# EAGLE board source_eagle (EAGLE 9.6.2)
REV: A
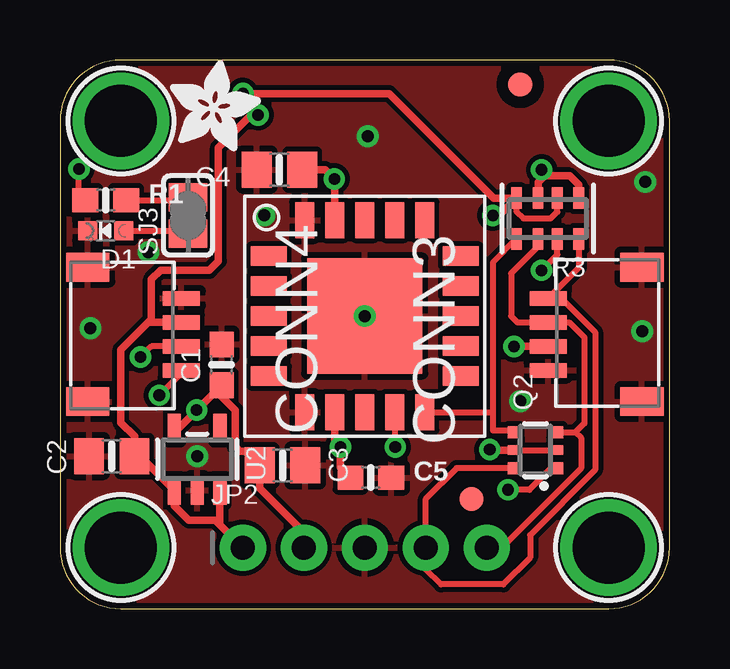
[diagram p0: board, top side]
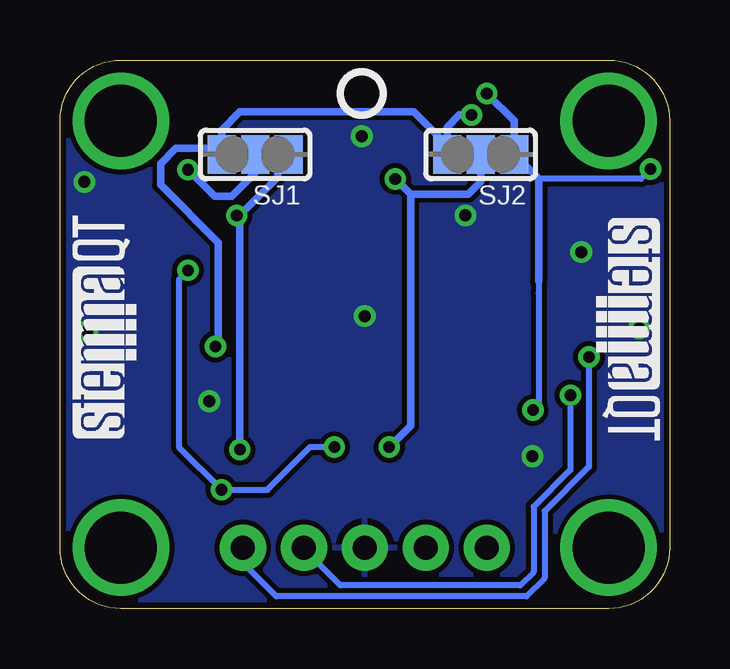
[diagram p1: board, bottom side, seen from below]

Size 25.4 x 22.86 mm. Coordinates in mm from the lower left corner, seen from the top.
Outline: 0,20.32 0,2.54 arc90 2.54,0 22.86,0 arc90 25.4,2.54 25.4,20.32 arc90 22.86,22.86 2.54,22.86 arc90 0,20.32
Copper layers (1*16): Top 0.035mm / dielectric 1.5mm / Bottom 0.035mm
Design rules "adafruit *": minimum track width 8mil, minimum drill 15.5mil, track to track 8mil, track to pad 8mil, pad to pad 8mil, via to via 8mil, smd to smd 8mil, copper to edge 10mil, drill to drill 8mil, minimum pad ring 10mil, minimum via ring 8mil, stop-mask expansion 2mil, vias tented up to drill 20mil, thermal gap 10mil
Net classes: 1 highpower: width 0.305 mm, drill 0.483 mm; 2 lowpower: width 0.254 mm, drill 0.483 mm

## Footprints (pad centres in the part's own frame; a part is rotated, then mirrored left to right if it is on the bottom)
0603-NO = smd 1.075 x 1: 1 -0.85,0; 2 0.85,0
0805-NO = smd 1.24 x 1.5: 1 -0.95,0; 2 0.95,0
JST_SH4 = smd 0.6 x 1.55: 1 -1.5,2.006; 2 -0.5,2.006; 3 0.5,2.006; 4 1.5,2.006 | smd 1.2 x 1.8: MT1 -2.8,-1.894; MT2 2.8,-1.894
CHIPLED_0603_NOOUTLINE = smd 0.8 x 0.8: A 0,-0.75; C 0,0.75
FIDUCIAL_1MM = smd 1 x 1: 1 0,0
1X05_ROUND_76 = drill 1 pad 1.93: 1 -5.08,0; 2 -2.54,0; 3 0,0; 4 2.54,0; 5 5.08,0
SOT363 = smd 0.5 x 0.5: 1 -0.75,-0.9; 3 0.75,-0.9; 4 0.75,0.9; 6 -0.75,0.9 | smd 0.4 x 0.5: 2 0,-0.9; 5 0,0.9
RESPACK_4X0603 = smd 0.45 x 0.9: 1 -1.3,-0.85; 2 -0.4,-0.85; 3 0.4,-0.85; 4 1.3,-0.85; 5 1.3,0.85; 6 0.4,0.85; 7 -0.4,0.85; 8 -1.3,0.85
SOLDERJUMPER_2WAY_OPEN_NOPASTE = smd 1.168 x 1.6: 1 -1.397,0; 2 0,0; 3 1.397,0
SOLDERJUMPER_CLOSEDWIRE = smd 1.168 x 1.6: 1 -0.762,0; 2 0.762,0 | smd 0.635 x 0.203: WIRE 0,0
SOT23-5 = smd 0.55 x 1.2: 1 -0.95,-1.3; 2 0,-1.3; 3 0.95,-1.3; 4 0.95,1.3; 5 -0.95,1.3
MOUNTINGHOLE_3.0_PLATEDTHIN = drill 3 pad 3.6: P$1 0,0
SCD41 = smd 1.5 x 0.8: 1 -4,2.5; 2 -4,1.25; 3 -4,0; 4 -4,-1.25; 5 -4,-2.5; 11 4,-2.5; 12 4,-1.25; 13 4,0; 14 4,1.25; 15 4,2.5 | smd 0.8 x 1.5: 6 -2.5,-4; 7 -1.25,-4; 8 0,-4; 9 1.25,-4; 10 2.5,-4; 16 2.5,4; 17 1.25,4; 18 0,4; 19 -1.25,4; 20 -2.5,4 | smd 4.8 x 4.8: P$1 0,0

## Placement (x,y rotation side)
C1  0.1uF  [0603-NO]  6.73,10.16 90 top
C2  10uF  [0805-NO]  2.16,6.35 180 top
C3  10uF  [0805-NO]  9.27,5.97 0 top
C4  10uF  [0805-NO]  9.14,18.29 180 top
C5  0.1uF  [0603-NO]  12.95,5.46 0 top
CONN3  STEMMA_I2C_QT  [JST_SH4]  22.35,11.43 90 top
CONN4  STEMMA_I2C_QT  [JST_SH4]  3.05,11.43 270 top
D1  GREEN  [CHIPLED_0603_NOOUTLINE]  1.91,15.75 90 top
FID3  FIDUCIAL_1MM  [FIDUCIAL_1MM]  19.18,21.84 0 top
FID4  FIDUCIAL_1MM  [FIDUCIAL_1MM]  17.14,4.57 0 top
JP2  [1X05_ROUND_76]  12.7,2.54 0 top
PLABEL0  [PLABEL0]  7.75,0.89 0 top
PLABEL1  [PLABEL1]  10.29,4.19 0 top
PLABEL2  [PLABEL2]  12.83,0.89 0 top
PLABEL3  [PLABEL3]  15.24,4.19 0 top
PLABEL4  [PLABEL4]  17.91,0.89 0 top
PLABEL5  [PLABEL5]  12.7,21.72 0 top
PLABEL6  [PLABEL6]  14.22,18.92 0 top
PLABEL7  [PLABEL7]  4.06,15.37 90 top
PLABEL8  [PLABEL8]  12.7,0.76 0 bottom
PLABEL9  [PLABEL9]  7.75,16.26 0 bottom
PLABEL10  [PLABEL10]  17.27,16.13 0 bottom
PLABEL11  [PLABEL11]  18.8,21.59 90 bottom
PLABEL12  [PLABEL12]  9.27,21.59 90 bottom
PLABEL13  [PLABEL13]  15.75,21.21 90 bottom
PLABEL14  [PLABEL14]  6.35,21.21 90 bottom
PLABEL15  [PLABEL15]  12.45,13.34 0 bottom
PLABEL16  [PLABEL16]  12.32,7.75 0 bottom
Q2  BSS138  [SOT363]  19.81,6.6 90 top
R1  10K  [0603-NO]  1.91,17.02 0 top
R3  10K Pack  [RESPACK_4X0603]  20.32,16.26 180 top
SJ1  [SOLDERJUMPER_2WAY_OPEN_NOPASTE]  17.27,18.92 180 bottom
SJ2  [SOLDERJUMPER_2WAY_OPEN_NOPASTE]  7.87,18.92 180 bottom
SJ3  [SOLDERJUMPER_CLOSEDWIRE]  5.33,16.38 90 top
U2  AP2112K-3.3  [SOT23-5]  5.71,6.22 0 top
U$1  MOUNTINGHOLE3.0THIN  [MOUNTINGHOLE_3.0_PLATEDTHIN]  2.54,20.32 0 top
U$17  MOUNTINGHOLE3.0THIN  [MOUNTINGHOLE_3.0_PLATEDTHIN]  22.86,20.32 0 top
U$19  MOUNTINGHOLE3.0THIN  [MOUNTINGHOLE_3.0_PLATEDTHIN]  2.54,2.54 0 top
U$21  MOUNTINGHOLE3.0THIN  [MOUNTINGHOLE_3.0_PLATEDTHIN]  22.86,2.54 0 top
U$22  [ADAFRUIT_3.5MM]  4.57,19.05 0 top
U$25  [PCBFEAT-REV-040]  12.83,21.46 0 bottom
U$30  [STEMMAQT]  22.23,7.11 90 bottom
U$31  [STEMMAQT]  3.05,16.26 270 bottom
X1  SCD-43  [SCD41]  12.7,12.19 0 top

## Library data of the parts
C1-C5 JP2 R1 R3 SJ1-SJ3 U$22 U$25 = microbuilder
CONN3 CONN4 = adafruit_electromech; LCSC: C2845363
D1 = microbuilder; ROT: 270
FID3 FID4 = microbuilder; BOM: EXCLUDE
PLABEL0 PLABEL1-PLABEL16 = pinguin
Q2 = microbuilder; JLC_ROTATION: 270
U2 = adafruit_power; JLC_ROTATION: 0
U$1 U$17 U$19 U$21 = adafruit_electromech; BOM: EXCLUDE
U$30 U$31 = silks
X1 = adafruit_sensor

## Nets
3.3V [lowpower]: C1.1 C3.1 JP2.2 Q2.2 Q2.5 R1.1 R3.2 R3.4 SJ1.1 SJ2.1 U2.5
GND [highpower]: C1.2 C2.2 C3.2 C4.2 C5.2 CONN3.1 CONN3.MT1 CONN3.MT2 CONN4.1 CONN4.MT1 CONN4.MT2 D1.C JP2.3 U2.2 X1.6 X1.20 X1.P$1
N$1: D1.A SJ3.1
N$4: R1.2 SJ3.2
POWER [lowpower]: C4.1 C5.1 SJ2.2 X1.7 X1.19
PULLUP [highpower]: R3.1 R3.3 SJ1.2
SCL: CONN3.4 CONN4.4 JP2.4 Q2.6 R3.8
SCL_3V: Q2.1 R3.7 X1.9
SDA: CONN3.3 CONN4.3 JP2.5 Q2.3 R3.6
SDA_3V: Q2.4 R3.5 X1.10
VCC [highpower]: C2.1 CONN3.2 CONN4.2 JP2.1 SJ1.3 SJ2.3 U2.1 U2.3

## Tracks (layer width: path | path; a pad name or v marks a point on that pad's centre or on a via)
3.3V  (via drill 0.48)
  Top 0.254: R3.4 19.02,16.54 19.3,16.26 20.45,16.26 20.72,16.53 R3.2 | Q2.5 Q2.2 | R1.1 0.79,17.28 v0.79,18.32
  Top 0.305: JP2.2 10.16,3.17 8.32,5.01 C3.1 7.72,6.57 7.49,6.57 7.3,6.76 7.3,8.27 6.73,8.84 C1.1 v5.7,8.27 4.94,7.52 U2.5 | v18.03,16.38 18.3,16.38 R3.4 18.07,17.11 13.72,21.46 v7.62,21.46 | v17.91,6.63 17.93,6.6 Q2.5
  Bottom 0.254: v5.7,8.27 5.46,8.51 5.46,13.13 5.46,13.64 | v0.79,18.32 1.2,17.91 5.46,17.91
  Bottom 0.305: v18.03,16.38 18.03,16.26 17.91,16.38 | 17.91,16.38 v17.91,6.63 | 5.46,13.64 5.46,17.91 SJ2.1 6.48,20.32 v7.62,21.46 | SJ1.1 16.33,18.47 16.33,17.98 17.91,16.4 17.91,16.38
GND  (via drill 0.5)
  other vias: 1.27,11.68 12.7,12.19 8.51,16.38 19.18,8.64 24.26,11.56 5.71,6.35 3.68,14.86 12.83,19.68 24.38,17.78
  pour Top: 0,22.86 25.4,22.86 25.4,0 0,0
  pour Bottom: 0,22.86 25.4,22.86 25.4,0 0,0
N$1
  Top 0.254: D1.A 5.21,15.75 SJ3.1
N$4
  Top 0.254: R1.2 5.21,17.02 SJ3.2
N$5
  Bottom 0.305: 16.76,18.92 16.38,18.92
N$6
  Bottom 0.305: 8.38,18.92 8.76,18.92
POWER  (via drill 0.48)
  Top 0.305: X1.7 11.45,6.96 v11.68,6.73 11.68,5.88 C5.1 | X1.19 11.45,17.89 v11.43,17.91 11.05,18.29 C4.1
  Bottom 0.305: v11.68,6.73 10.79,7.62 10.79,17.27 | 10.79,17.27 v11.43,17.91 | SJ2.2 7.87,17.78 8.38,17.27 10.79,17.27
PULLUP  (via drill 0.48)
  Top 0.305: R3.3 19.92,17.76 20.19,18.03 20.32,18.03 | R3.1 21.62,17.65 21.24,18.03 20.32,18.03 | v20.07,18.29 20.32,18.03
  Bottom 0.305: SJ1.2 17.27,18.16 18.25,17.18 18.96,17.18 v20.07,18.29
SCL  (via drill 0.48)
  Top 0.254: v4.13,8.89 5.05,9.81 CONN4.4 | Q2.6 16.52,5.85 15.24,4.57 JP2.4 15.24,1.65 15.88,1.02 18.47,1.02 19.58,2.13 19.58,3.06 22.3,5.78 22.3,11.52 20.89,12.93 CONN3.4 21.62,14.2 R3.8
  Bottom 0.254: v4.13,8.89 4.13,5.78 5.66,4.25 5.66,1.52 6.22,0.96 13.72,0.96 15.24,2.49 JP2.4
SCL_3V  (via drill 0.48)
  Top 0.254: X1.9 13.95,6.75 v13.97,6.73 | Q2.1 20.46,5.85 19.56,4.95 v18.67,4.95 | v20.07,14.1 20.72,14.75 R3.7
  Bottom 0.254: v13.97,6.73 14.99,6.73 16.76,4.95 v18.67,4.95 20.45,6.73 20.45,13.72 v20.07,14.1
SDA  (via drill 0.48)
  Top 0.254: CONN4.3 3.81,10.93 v3.36,10.48 | Q2.3 21.48,7.35 | 21.48,7.35 21.72,7.11 21.72,5.84 18.41,2.54 JP2.5 | 21.48,7.35 21.84,7.72 21.84,11.3 21.22,11.93 CONN3.3 19.06,11.93 18.8,12.19 18.8,13.97 19.92,15.09 R3.6
  Bottom 0.254: v3.36,10.48 3.36,5.91 5.21,4.06 5.21,1.27 5.97,0.51 16.38,0.51 17.78,1.91 JP2.5
SDA_3V
  Top 0.254: 15.37,8.19 18.03,8.19 | Q2.4 18.84,7.43 18.03,7.43 18.03,8.19 | R3.5 18.03,14.42 18.03,8.19
  Top 0.305: X1.10 15.37,8.19 | X1.10
VCC  (via drill 0.48)
  Top 0.305: 3.67,11.93 CONN4.2 | 3.67,11.93 2.54,10.79 2.54,7.75 3.11,7.18 C2.1 3.34,6.35 U2.1 4.76,4.29 5.38,3.68 6.48,3.68 JP2.1 6.67,3.5 U2.3 | 3.67,11.93 3.81,12.06 3.81,13.72 4.19,14.1 6.22,14.1 6.6,14.48 6.6,19.21 7.97,20.57 v8.26,20.57 | CONN3.2 18.93,10.93 v18.92,10.92
  Bottom 0.305: SJ2.3 9.27,19.3 | 9.27,19.3 10.67,20.7 17.91,20.7 18.67,19.94 SJ1.3 18.92,19.18 20.57,19.18 21.21,18.54 21.21,17.65 18.8,15.24 18.8,11.05 v18.92,10.92 | v8.26,20.57 8.76,20.57 9.27,20.07 9.27,19.3

## Text on the board
Pinguin_tBackup: SCD43 | CO2/Temp/Hum / Sensor | on | 3Vo | SCL | VIN | GND | SDA
Pinguin_bBackup: Vin | Vin | 3V | 3V | Sensor / Power | I2C / logic | SCD43 CO2 Sensor | Photoacoustic CO2, / Temp & Humidity / I2C Addr 0x62 | VLogic/Vcc: 3-5VDC